# Altium PCB NANO_STM32F103.PcbDoc
Units mm, origin at the board's own origin, x right, y up, seen from the top; angles counter-clockwise.
Board outline 100 x 60 mm, 2 copper layers (Top Layer, Bottom Layer); 129 components, 126 nets, 497 pads, 0 vias.
Unrouted connection lines stored in the file: 346.
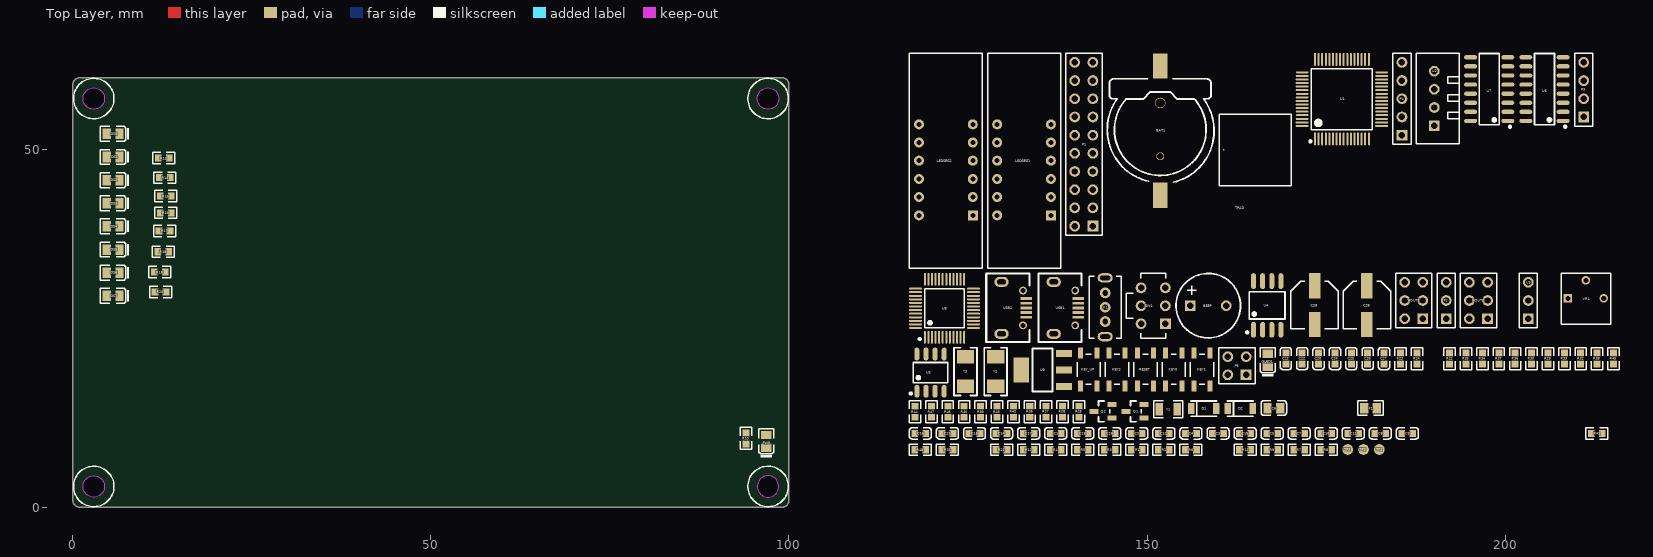
[diagram p0: Top Layer view]
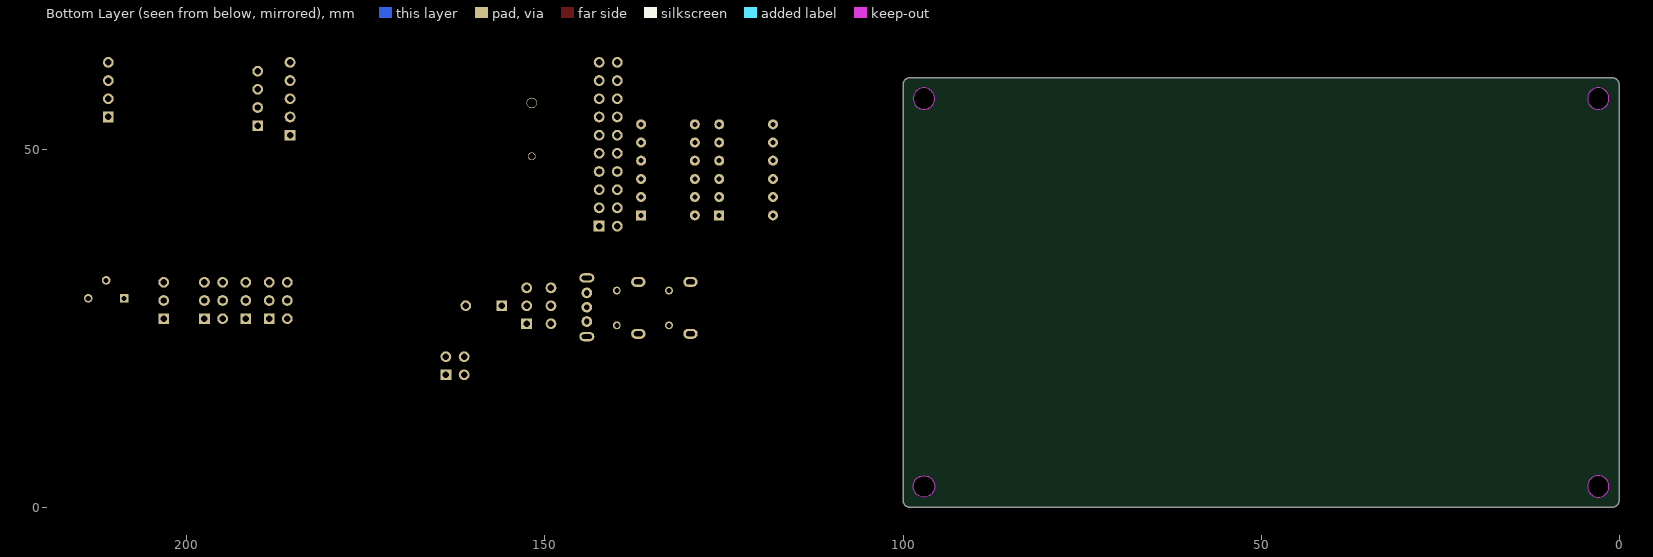
[diagram p1: Bottom Layer view, seen from below]

## Layer stack, top to bottom
Top Solder: solder mask 0.0102, Solder Resist, Dk 3.5
Top Layer: signal copper 0.0356
Dielectric 1: dielectric 0.32, FR-4, Dk 4.8
Bottom Layer: signal copper 0.0356
Bottom Solder: solder mask 0.0102, Solder Resist, Dk 3.5

## Board outline
1,0 cw(c1,1) 0,1 0,59 cw(c1,59) 1,60 99,60 cw(c99,59) 100,59 100,1 cw(c99,1) 99,0
cut-out: 95.579,2.921 ccw(c97.079,2.921) 97.079,1.421 ccw(c97.079,2.921) 98.579,2.921 ccw(c97.079,2.921) 97.079,4.421 ccw(c97.079,2.921)
cut-out: 2.921,1.421 cw(c2.921,2.921) 1.421,2.921 cw(c2.921,2.921) 2.921,4.421 cw(c2.921,2.921) 4.421,2.921 cw(c2.921,2.921)
cut-out: 2.921,55.574 cw(c2.921,57.074) 1.421,57.074 cw(c2.921,57.074) 2.921,58.574 cw(c2.921,57.074) 4.421,57.074 cw(c2.921,57.074)
cut-out: 97.079,55.574 cw(c97.079,57.074) 95.579,57.074 cw(c97.079,57.074) 97.079,58.574 cw(c97.079,57.074) 98.579,57.074 cw(c97.079,57.074)

## Design rules (kind name [scope] priority, off if disabled: settings)
Clearance [All] p1: gap=0.254 ignorepadtopadclearanceinfootprint=FALSE except(0: Arc-Hole Track-Hole SMDPad-Hole THPad-Hole Via-Hole Fill-Hole Poly-Hole Region-Hole Text-Hole)
PolygonConnect [All] p1: connectstyle=Relief reliefconductorwidth=0.254 reliefentries=4 polygonreliefangle="90 Angle" airgapwidth=0.254
RoutingVias [All] p1: holewidth=0.711 width=1.27 viastyle="Through Hole" minholewidth=0.711 minwidth=1.27 maxholewidth=0.711 maxwidth=1.27
SolderMaskExpansion [All] p1: expansion=0.102
Width [All] p1: maxlimit=0.254 minlimit=0.254 preferedwidth=0.254
30 further rules are at their usual default settings.

## Classes and differential pairs
component class NANO_STM32F103_3: C19 C20 C21 C22 C23 C24 C25 GLED1 P4 P5 Q2 R31 R32 R33 R34 R35 R36 R37 R38 R39 R40 R41 R42 R43 R44 R45 R46 R47 R48 SW1 TP1 TP2 TP3 U8 USB1 USB2 Y3
component class NANO_STM32F103_2: BEEP C13 C14 C15 C16 C17 C18 DS0 DS1 DS2 DS3 DS4 DS5 DS6 DS7 KEY0 KEY1 KEY2 KEY_UP LEDSEG1 LEDSEG2 P3 PWR Q1 R5 R6 R7 R8 R9 R10 R11 R12 R13 R14 R15 R16 R17 R18 R19 R20 R21 R22 R23 R24 R25 R26 R27 R28 R29 R30 TPAD U2 U3 U4 U5 U6 U7 VR1
component class NANO_STM32F103_1: BAT1 C1 C2 C3 C4 C5 C6 C7 C8 C9 C10 C11 C12 C26 C27 C28 C29 D1 D2 F1 K1 P1 P2 R1 R2 R3 R4 RESET U1 U9 VOUT1 VOUT2 Y1 Y2

## Components (designator, comment, footprint, x,y, rotation, side; value= is the part's Value field where it differs from the comment)
BAT1 "Battery" BAT-2 151.844,61.648 r0 top
BEEP "Bell" PIN2 158.544,28.165 r0 top
C1 "100nF (104)" 0603_C 137.238,10.328 r0 top
C2 "22pF (220)" 0603_C 148.572,10.328 r0 top
C3 "22pF (220)" 0603_C 159.906,10.328 r0 top
C4 "22pF (220)" 0603_C 156.128,10.328 r0 top
C5 "22pF (220)" 0603_C 167.462,10.328 r0 top
C6 "10uF (106)" 0805_C 167.704,13.861 r0 top
C7 "100nF (104)" 0603_C 171.24,10.328 r0 top
C8 "100nF (104)" 0603_C 182.574,10.328 r0 top
C9 "100nF (104)" 0603_C 186.352,10.328 r0 top
C10 "100nF (104)" 0603_C 175.018,10.328 r0 top
C11 "100nF (104)" 0603_C 178.796,10.328 r0 top
C12 "100nF (104)" 0603_C 152.35,10.328 r0 top
C13 "100nF (104)" 0603_C 125.904,10.328 r0 top
C14 "100nF (104)" 0603_C 129.682,10.328 r0 top
C15 "100nF (104)" 0603_C 163.684,10.328 r0 top
C16 "100nF (104)" 0603_C 118.348,10.328 r0 top
C17 "100nF (104)" 0603_C 133.46,10.328 r0 top
C18 "100nF (104)" 0603_C 141.016,10.328 r0 top
C19 "22pF (220)" 0603_C 144.794,10.328 r0 top
C20 "22pF (220)" 0603_C 173.947,20.773 r90 top
C21 "100nF (104)" 0603_C 122.126,10.328 r0 top
C22 "100nF (104)" 0603_C 171.659,20.773 r90 top
C23 "100nF (104)" 0603_C 169.371,20.773 r90 top
C24 "100nF (104)" 0603_C 176.235,20.773 r90 top
C25 "100nF (104)" 0603_C 178.523,20.773 r90 top
C26 "100nF (104)" 0603_C 180.811,20.773 r90 top
C27 "100nF (104)" 0603_C 183.099,20.773 r90 top
C28 "220uF" RB7.6-15 180.693,28.24 r0 top value=100pF
C29 "220uF" RB7.6-15 173.385,28.24 r0 top value=100pF
D1 "LL4148" LL-34 157.913,13.794 r0 top
D2 "LL4148" LL-34 163.024,13.794 r0 top
DS0 "LED" 0805_LED_S1 5.613,52.146 r180 top
DS1 "LED" 0805_LED_S1 5.613,48.917 r180 top
DS2 "LED" 0805_LED_S1 5.613,45.687 r180 top
DS3 "LED" 0805_LED_S1 5.613,42.458 r180 top
DS4 "LED" 0805_LED_S1 5.613,39.228 r180 top
DS5 "LED" 0805_LED_S1 5.613,35.999 r180 top
DS6 "LED" 0805_LED_S1 5.613,32.77 r180 top
DS7 "LED" 0805_LED_S1 5.613,29.54 r180 top
F1 "1000mA" 0805_R 181.198,13.861 r0 top
GLED1 "翠绿 0805" 0805_LED_S1 166.838,20.538 r90 top
K1 "BUTTON_DIP3" SW 144.15,27.94 r90 top
KEY0 "SW-PB" SPST-2 153.724,19.257 r90 top
KEY1 "SW-PB" SPST-2 157.682,19.257 r90 top
KEY2 "SW-PB" SPST-2 145.808,19.257 r90 top
KEY_UP "SW-PB" SPST-2 141.85,19.257 r90 top
LEDSEG1 "LEDSEG028" HDR1X12 136.571,40.78 r90 top
LEDSEG2 "LEDSEG028" HDR1X12 125.663,40.78 r90 top
P1 "Header 10X2" HDR2X10 142.439,39.27 r90 top
P2 "Header 3" HDR1X3 191.759,26.342 r90 top
P3 "Header 4" HDR1X4 210.967,54.51 r90 top
P4 "Header 5" HDR1X5 185.589,51.97 r90 top
P5 "Header 2X2" HDR2X2 163.825,18.498 r90 top
PWR "LED" 0805_LED_S1 96.825,9.22 r90 top
Q1 "SS8550" SOT-23(SOT-23-3) 148.319,13.409 r0 top
Q2 "SS8050" SOT-23(SOT-23-3) 143.858,13.409 r0 top
R1 "10Ω" 0603_R 148.572,8.04 r0 top
R2 "10KΩ" 0603_R 152.35,8.04 r0 top
R3 "100KΩ" 0603_R 144.794,8.04 r0 top
R4 "10KΩ" 0603_R 137.238,8.04 r0 top
R5 "4.7KΩ" 0603_R 141.016,8.04 r0 top
R6 "4.7KΩ" 0603_R 156.128,8.04 r0 top
R7 "1KΩ" 0603_R 171.24,8.04 r0 top
R8 "4.7KΩ" 0603_R 175.018,8.04 r0 top
R9 "4.7KΩ" 0603_R 167.462,8.04 r0 top
R10 "510Ω" 0603_R 93.98,9.619 r90 top
R11 "100KΩ" 0603_R 163.684,8.04 r0 top
R12 "1KΩ" 0603_R 133.46,8.04 r0 top
R13 "510Ω" 0603_R 12.675,48.768 r0 top
R14 "510Ω" 0603_R 12.852,46.025 r0 top
R15 "510Ω" 0603_R 12.954,43.459 r0 top
R16 "510Ω" 0603_R 12.954,41.123 r0 top
R17 "510Ω" 0603_R 12.802,38.583 r0 top
R18 "510Ω" 0603_R 12.624,35.687 r0 top
R19 "510Ω" 0603_R 12.116,32.842 r0 top
R20 "510Ω" 0603_R 12.243,30.048 r0 top
R21 "100Ω" 0603_R 129.682,8.04 r0 top
R22 "100Ω" 0603_R 192.251,20.773 r90 top
R23 "100Ω" 0603_R 185.387,20.773 r90 top
R24 "100Ω" 0603_R 187.675,20.773 r90 top
R25 "100Ω" 0603_R 140.483,13.361 r90 top
R26 "100Ω" 0603_R 133.619,13.361 r90 top
R27 "100Ω" 0603_R 135.907,13.361 r90 top
R28 "100Ω" 0603_R 138.195,13.361 r90 top
R29 "10KΩ" 0603_R 205.979,20.773 r90 top
R30 "1KΩ" 0603_R 203.691,20.773 r90 top
R31 "1KΩ" 0603_R 122.126,8.04 r0 top
R32 "10KΩ" 0603_R 210.555,20.773 r90 top
R33 "10KΩ" 0603_R 208.267,20.773 r90 top
R34 "4.7KΩ" 0603_R 196.827,20.773 r90 top
R35 "4.7KΩ" 0603_R 194.539,20.773 r90 top
R36 "100Ω" 0603_R 201.403,20.773 r90 top
R37 "10KΩ" 0603_R 199.115,20.773 r90 top
R38 "100Ω" 0603_R 212.843,20.773 r90 top
R39 "1.5KΩ" 0603_R 126.755,13.361 r90 top
R40 "36KΩ" 0603_R 124.467,13.361 r90 top
R41 "10KΩ" 0603_R 212.798,10.328 r0 top
R42 "10KΩ" 0603_R 131.331,13.361 r90 top
R43 "10Ω" 0603_R 129.043,13.361 r90 top
R44 "10Ω" 0603_R 117.603,13.361 r90 top
R45 "1.5KΩ" 0603_R 215.131,20.773 r90 top
R46 "10Ω" 0603_R 122.179,13.361 r90 top
R47 "10Ω" 0603_R 119.891,13.361 r90 top
R48 "10KΩ" 0603_R 118.348,8.04 r0 top
RESET "SW-PB" SPST-2 149.766,19.257 r90 top
SW1 "LY_SK_09C" HDR2X3_CEN 150.858,28.142 r90 top
TP1 "SWD" PIN1 182.435,8.079 r0 top
TP2 "SWC" PIN1 180.224,8.079 r90 top
TP3 "GND" PIN1 178.013,8.079 r90 top
TPAD "电容触摸键" TPAD 160.686,49.911 r90 top
U1 "STM32F103RBT6" LQFP-64_10X10X05P 177.21,56.999 r0 top
U2 "DHT11&DS18B20" DHT11&DS18B20 190.117,57.1 r90 top
U3 "HS0038" HS0038 203.241,28.882 r90 top
U4 "W25Q16" SOIC-8_208MIL 166.777,28.19 r0 top
U5 "24C02" SOIC-8_150MIL 119.763,18.807 r0 top
U6 "74HC595D" SOIC-16_150MIL 205.488,58.398 r90 top
U7 "74HC138D" SOIC-16_150MIL 197.777,58.398 r90 top
U8 "STM32F103C8T6" LQFP-48_7X7X05P 121.714,27.791 r0 top
U9 "AMS1117-3.3" SOT-223 135.416,19.166 r0 top
USB1 "USB-AB" USB_MICRO 140.39,27.841 r90 top
USB2 "USB-AB" USB_MICRO 133.101,27.841 r90 top
VOUT1 "VCC3.3" HDR2X3 188.511,26.342 r90 top
VOUT2 "VCC5" HDR2X3 197.547,26.342 r90 top
VR1 "GF063P1" VR5 211.268,30.442 r0 top value=1K
Y1 "32.768KHz ±20ppm 12.5pF" "SMD-3215_2P FC - 135" 152.953,13.696 r0 top
Y2 "8MHz ±20ppm 20pF" SMD-5032_2P 128.86,18.956 r90 top
Y3 "8MHz ±20ppm 20pF" SMD-5032_2P 124.652,18.956 r90 top

## Footprints (in the part's own frame and the unit in brackets; to place one, negate y for a bottom-side part, rotate by r counter-clockwise, add the part's x,y. Pads: shape width x height; smd on the part's side, far side on the other; paste and mask are expansions set on the pad)
0603_C [mm]
  rect 0.93x0.98 smd: 1(-0.77,0) 2(0.77,0)
  silkscreen extent -1.53,-0.79 1.54,0.79, body extent -0.8,-0.4 0.8,0.4, height 0.3
0603_R [mm]
  rect 0.93x0.98 smd: 1(-0.77,0) 2(0.77,0)
  silkscreen extent -1.53,-0.79 1.54,0.79, body extent -0.85,-0.4 0.85,0.4, height 0.56
0805_C [mm]
  rect 1.16x1.47 smd: 1(-0.89,0) 2(0.89,0)
  silkscreen extent -1.77,-1.04 1.77,1.04, body extent -1,-0.62 1,0.63, height 0.77
0805_LED_S1 [mm]
  rect 1.16x1.47 smd: A(0.89,0) K(-0.89,0)
  silkscreen extent -2.25,-1.04 1.77,1.03, body extent -1.01,-0.62 1.01,0.62, height 1.1
0805_R [mm]
  rect 1.16x1.47 smd: 1(-0.89,0) 2(0.89,0)
  silkscreen extent -1.77,-1.04 1.77,1.03, body extent -1,-0.62 1,0.63, height 0.49
BAT-2 [mm] "Battery; 2 Leads"
  rect 2x3.5 smd: 1(0,0) 2(0,-18.067)
  round 1.45 hole 1.3: 3(0,-5.181)
  round 1.1 hole 0.95: 4(0,-12.631)
  silkscreen extent -7.4,-16.26 7.52,-1.81, body extent -7.5,-17.99 7.49,0.51, height 3.99
DHT11&DS18B20 [mm] "DHT11&DS18B20_2.54mm"
  rect 1.5x1.5 hole 0.9: 1(-3.81,0)
  round 1.5 hole 0.9: 2(-1.27,0) 3(1.27,0) 4(3.81,0)
  silkscreen extent -6.3,-3.45 6.3,2.55, body extent -5.08,-1.27 5.08,1.27, height 6.12
HDR1X3 [mm] "Connector; Header; 3 Position"
  rect 1.5x1.5 hole 0.9: 1(0,0)
  round 1.5 hole 0.9: 2(2.54,0) 3(5.08,0)
  silkscreen extent -1.27,-1.27 6.35,1.27, body extent -1.27,-1.27 6.35,1.27, height 10.15
HDR1X4 [mm] "Connector; Header; 4 Position"
  rect 1.5x1.5 hole 0.9: 1(0,0)
  round 1.5 hole 0.9: 2(2.54,0) 3(5.08,0) 4(7.62,0)
  silkscreen extent -1.27,-1.27 8.89,1.27, body extent -1.27,-1.27 8.89,1.27, height 1.02
HDR1X5 [mm] "Connector; Header; 5 Position"
  rect 1.5x1.5 hole 0.9: 1(0,0)
  round 1.5 hole 0.9: 2(2.54,0) 3(5.08,0) 4(7.62,0) 5(10.16,0)
  silkscreen extent -1.27,-1.27 11.43,1.27, body extent -1.27,-1.27 11.43,1.27, height 10.17
HDR1X12 [mm] "0.28英寸共阴数码管四位_JM-S02843AH-001"
  rect 1.4x1.4 hole 0.7: 1(0,0)
  round 1.4 hole 0.7: 2(2.54,0) 3(5.08,0) 4(7.62,0) 5(10.16,0) 6(12.7,0) 7(12.7,7.5) 8(10.16,7.5) 9(7.62,7.5) 10(5.08,7.5) 11(2.54,7.5) 12(0,7.5)
  silkscreen extent -7.38,-1.35 22.62,8.85, body extent -7.38,-1.35 22.62,8.85, height 4
HDR2X2 [mm] "Connector; Header; 2x2 Position"
  rect 1.5x1.5 hole 0.9: 1(0,0)
  round 1.5 hole 0.9: 2(0,2.54) 3(2.54,0) 4(2.54,2.54)
  silkscreen extent -1.27,-1.27 3.81,3.81, body extent -1.27,-1.27 3.81,3.81, height 10.18
HDR2X3 [mm] "Connector; Header; 3x2 Position"
  rect 1.5x1.5 hole 0.9: 1(0,0)
  round 1.5 hole 0.9: 2(0,2.54) 3(2.54,0) 4(2.54,2.54) 5(5.08,0) 6(5.08,2.54)
  silkscreen extent -1.27,-1.27 6.35,3.81, body extent -1.27,-1.27 6.35,3.81, height 10.18
HDR2X3_CEN [mm] "Connector; Header; 3x2 Position"
  rect 1.5x1.5 hole 0.9: 1(-2.5,-1.7)
  round 1.5 hole 0.9: 2(0,-1.7) 3(2.5,-1.7) 4(-2.5,1.7) 5(0,1.7) 6(2.5,1.7)
  silkscreen extent -4.55,-1.75 4.55,3.75, body extent -4.5,-1.8 4.5,1.8, height 5.5
HDR2X10 [mm] "Connector; Header; 10x2 Position"
  rect 1.5x1.5 hole 0.9: 1(0,0)
  round 1.5 hole 0.9: 2(0,2.54) 3(2.54,0) 4(2.54,2.54) 5(5.08,0) 6(5.08,2.54) 7(7.62,0) 8(7.62,2.54) 9(10.16,0) 10(10.16,2.54) 11(12.7,0) 12(12.7,2.54) 13(15.24,0) 14(15.24,2.54) 15(17.78,0) 16(17.78,2.54) 17(20.32,0) 18(20.32,2.54) 19(22.86,0) 20(22.86,2.54)
  silkscreen extent -1.27,-1.27 24.13,3.81, body extent -1.27,-1.27 24.13,3.81, height 10.18
HS0038 [mm] "2.54mm"
  rect 1.5x1.5 hole 0.9: 1(-2.54,0)
  round 1.5 hole 0.9: 2(0,0) 3(2.54,0)
  silkscreen extent -3.81,-1.27 3.81,1.27, body extent -3,-3.97 3,3.82, height 8.97
LL-34 [mm]
  rect 0.9x1.5 smd: 1(1.75,0) 2(-1.75,0)
  silkscreen extent -1.8,-1.08 1.8,1.08, body extent -1.75,-0.75 1.75,0.75, height 1.5
LQFP-48_7X7X05P [mm]
  oval 0.28x1.8 smd mask+0.051: 1(-2.75,-4.05) 2(-2.25,-4.05) 3(-1.75,-4.05) 4(-1.25,-4.05) 5(-0.75,-4.05) 6(-0.25,-4.05) 7(0.25,-4.05) 8(0.75,-4.05) 9(1.25,-4.05) 10(1.75,-4.05) 11(2.25,-4.05) 12(2.75,-4.05) 25(2.75,4.05) 26(2.25,4.05) 27(1.75,4.05) 28(1.25,4.05) 29(0.75,4.05) 30(0.25,4.05) 31(-0.25,4.05) 32(-0.75,4.05) 33(-1.25,4.05) 34(-1.75,4.05) 35(-2.25,4.05) 36(-2.75,4.05)
  oval 1.8x0.28 smd mask+0.051: 13(4.05,-2.75) 14(4.05,-2.25) 15(4.05,-1.75) 16(4.05,-1.25) 17(4.05,-0.75) 18(4.05,-0.25) 19(4.05,0.25) 20(4.05,0.75) 21(4.05,1.25) 22(4.05,1.75) 23(4.05,2.25) 24(4.05,2.75) 37(-4.05,2.75) 38(-4.05,2.25) 39(-4.05,1.75) 40(-4.05,1.25) 41(-4.05,0.75) 42(-4.05,0.25) 43(-4.05,-0.25) 44(-4.05,-0.75) 45(-4.05,-1.25) 46(-4.05,-1.75) 47(-4.05,-2.25) 48(-4.05,-2.75)
  silkscreen extent -3.6,-4.42 2.75,2.75, body extent -4.5,-4.5 4.5,4.5, height 1.56
LQFP-64_10X10X05P [mm]
  oval 0.28x1.8 smd mask+0.051: 1(-3.75,-5.55) 2(-3.25,-5.55) 3(-2.75,-5.55) 4(-2.25,-5.55) 5(-1.75,-5.55) 6(-1.25,-5.55) 7(-0.75,-5.55) 8(-0.25,-5.55) 9(0.25,-5.55) 10(0.75,-5.55) 11(1.25,-5.55) 12(1.75,-5.55) 13(2.25,-5.55) 14(2.75,-5.55) 15(3.25,-5.55) 16(3.75,-5.55) 33(3.75,5.55) 34(3.25,5.55) 35(2.75,5.55) 36(2.25,5.55) 37(1.75,5.55) 38(1.25,5.55) 39(0.75,5.55) 40(0.25,5.55) 41(-0.25,5.55) 42(-0.75,5.55) 43(-1.25,5.55) 44(-1.75,5.55) 45(-2.25,5.55) 46(-2.75,5.55) 47(-3.25,5.55) 48(-3.75,5.55)
  oval 1.8x0.28 smd mask+0.051: 17(5.55,-3.75) 18(5.55,-3.25) 19(5.55,-2.75) 20(5.55,-2.25) 21(5.55,-1.75) 22(5.55,-1.25) 23(5.55,-0.75) 24(5.55,-0.25) 25(5.55,0.25) 26(5.55,0.75) 27(5.55,1.25) 28(5.55,1.75) 29(5.55,2.25) 30(5.55,2.75) 31(5.55,3.25) 32(5.55,3.75) 49(-5.55,3.75) 50(-5.55,3.25) 51(-5.55,2.75) 52(-5.55,2.25) 53(-5.55,1.75) 54(-5.55,1.25) 55(-5.55,0.75) 56(-5.55,0.25) 57(-5.55,-0.25) 58(-5.55,-0.75) 59(-5.55,-1.25) 60(-5.55,-1.75) 61(-5.55,-2.25) 62(-5.55,-2.75) 63(-5.55,-3.25) 64(-5.55,-3.75)
  silkscreen extent -4.55,-6.05 4.25,4.25, body extent -6,-6 6,6, height 1.6
PIN1 [mm] "测试焊盘"
  round 1.5 smd: 1(0,0)
PIN2 [mm] "Photosensitive Diode; 2 Leads"
  rect 1.5x1.5 hole 0.9: 1(-2.5,0)
  round 1.5 hole 0.9: 2(2.5,0)
  silkscreen extent -4.5,-4.5 4.5,4.5, body extent -4.55,-4.55 4.55,4.55, height 5.63
RB7.6-15 [mm] "6.5mm*5.4mm贴片电解电容"
  rect 1.6x3.5 smd: 1(0,2.7) 2(0,-2.7)
  silkscreen extent -3.3,-3.3 3.3,3.3, body extent -3.3,-3.5 3.3,3.5, height 5.41
"SMD-3215_2P FC - 135" [mm]
  rect 1x1.8 smd: 1(-1.25,0) 2(1.25,0)
  silkscreen extent -2.05,-1.2 2.05,1.2, body extent -1.61,-0.76 1.61,0.76, height 0.91
SMD-5032_2P [mm]
  rect 1.9x2.4 smd: 1(-2.05,0) 2(2.05,0)
  silkscreen extent -3.32,-1.6 3.32,1.6, body extent -3.1,-1.85 3.1,1.85
SOIC-8_150MIL [mm]
  oval 0.7x1.8 smd: 1(-1.905,-2.6) 2(-0.635,-2.6) 3(0.635,-2.6) 4(1.905,-2.6) 5(1.905,2.6) 6(0.635,2.6) 7(-0.635,2.6) 8(-1.905,2.6)
  silkscreen extent -2.9,-3.05 2.4,1.4, body extent -2.5,-3.1 2.5,3.1, height 1.72
SOIC-8_208MIL [mm]
  oval 0.7x2.2 smd: 1(-1.905,-3.4) 2(-0.635,-3.4) 3(0.635,-3.4) 4(1.905,-3.4) 5(1.905,3.4) 6(0.635,3.4) 7(-0.635,3.4) 8(-1.905,3.4)
  silkscreen extent -2.95,-3.9 2.5,1.9, body extent -2.7,-4.1 2.7,4.1, height 2.14
SOIC-16_150MIL [mm]
  oval 0.6x1.8 smd: 1(-4.445,-2.6) 2(-3.175,-2.6) 3(-1.905,-2.6) 4(-0.635,-2.6) 5(0.635,-2.6) 6(1.905,-2.6) 7(3.175,-2.6) 8(4.445,-2.6) 9(4.445,2.6) 10(3.175,2.6) 11(1.905,2.6) 12(0.635,2.6) 13(-0.635,2.6) 14(-1.905,2.6) 15(-3.175,2.6) 16(-4.445,2.6)
  silkscreen extent -5.4,-3.05 4.97,1.4, body extent -4.9,-2.9 4.9,2.9, height 1.75
SOT-23(SOT-23-3) [mm]
  rect 1.25x0.7 smd: 1(1.25,-0.95) 2(1.25,0.95) 3(-1.25,0)
  silkscreen extent -0.65,-1.46 0.9,1.46, body extent -1.5,-1.5 1.5,1.5, height 1.3
SOT-223 [mm]
  rect 2.2x1 smd: 1(3,-2.3) 2(3,0) 3(3,2.3)
  rect 2.2x3.5 smd: 2(-3,0)
  silkscreen extent -1.4,-3 1.4,3, body extent -3.49,-3.24 3.49,3.24, height 1.64
SPST-2 [mm] "Switch; 2 Leads"
  rect 1.5x0.7 smd: 1(-2.3,1.125) 1(2.3,1.125) 2(-2.3,-1.125) 2(2.3,-1.125)
  silkscreen extent -2.1,-1.63 2.1,1.63, body extent -2.3,-1.6 2.3,1.6, height 2.52
SW [mm] "拨动开关"
  oval 1.3x2.1 hole 1.4 slot 0.6 at 0 deg: 1(-4.1,0) 5(4.1,0)
  round 1.5 hole 0.8: 2(-2,0) 3(0,0) 4(2,0)
  silkscreen extent -4.3,-2.25 4.3,2.25, body extent -4.27,-2.15 4.33,2.15, height 8.08
TPAD [mm] "电容触摸按键"
  round 0.2 smd: 1(0,0)
  Top Layer pour cut-out: 13.589,-6.031
  Top Layer pour cut-out: 0,0.635
  silkscreen extent -5,-9.42 5,0.58
USB_MICRO [mm]
  rect 0.4x1.6 smd: 1(1.3,0) 2(0.65,0) 3(0,0) 4(-0.65,0) 5(-1.3,0)
  round 1.1 hole 0.7: 6(-2.425,0.419) 9(2.425,0.419)
  oval 1.4x2 hole 0.7 slot 1.2 at 90 deg: 7(-3.612,3.422) 8(3.638,3.422)
  silkscreen extent -4.78,-0.47 4.8,5.56, body extent -4.1,0.45 4.1,5.88, height 2.66
VR5 [mm] "Thru-Hole; 3 Leads"
  rect 1.2x1.2 hole 0.7: 1(-2.5,-1.25)
  round 1.2 hole 0.7: 2(0,1.25) 3(2.5,-1.25)
  silkscreen extent -3.45,-4.85 3.45,2.25, body extent -3.35,-4.82 3.36,2.21, height 4.73

## Part data
BAT1: "Multicell Battery", LatestRevisionDate=17-Jul-2002, LatestRevisionNote="Re-released for DXP Platform.", PackageDescription="Battery; 2 Leads", PackageReference=BAT-2, Published=24-Mar-1999, Publisher="Altium Limited"
BEEP: "Electrical Bell", LatestRevisionDate=17-Jul-2002, LatestRevisionNote="Re-released for DXP Platform.", PackageReference=PIN2, Published=24-Mar-1999, Publisher="Altium Limited"
C1 C7 C8 C9 C10 C11 C12 C13 C14 C15 C16 C17 C18 C21 C22 C23 C24 C25 C26 C27: library part "0603 100nF (104) 10% 50V", "贴片电容", Package=0603, SuppliersPartNumber=C14663, ComponentLink1Description=供应商, ComponentLink1URL=http://www.szlcsc.com/product/details_15331.html, Supplier=LC
C2 C3 C4 C5 C19 C20: library part "0603 22pF (220) 5% 50V", "贴片电容", Package=0603, SuppliersPartNumber=C1653, ComponentLink1Description=供应商, ComponentLink1URL=http://www.szlcsc.com/product/details_2005.html, Supplier=LC
C6: library part "0805 10uF (106) 10% 25V", "贴片电容", Package=0805, SuppliersPartNumber=C15850, ComponentLink1Description=供应商, ComponentLink1URL=http://www.szlcsc.com/product/details_16532.html, Supplier=LC
C28 C29: library part "Cap Pol1", "电解电容", LatestRevisionDate=17-Jul-2002, LatestRevisionNote="Re-released for DXP Platform.", PackageDescription="Polarized Capacitor (Radial); 2 Leads", PackageReference=RB7.6-15, Published=8-Jun-2000, Publisher="Altium Limited"
D1 D2: library part "LL-34 LL4148 LL-34 1206", "开关二极管", Package=LL-34, SuppliersPartNumber=C9808, ComponentLink1Description=供应商, ComponentLink1URL=http://www.szlcsc.com/product/details_10338.html, Supplier=LC
DS0 DS1 DS2 DS3 DS4 DS5 DS6 DS7 PWR: library part "0603 红灯", "发光二极管", Package=0603, SuppliersPartNumber=C2286, ComponentLink1Description=供应商, ComponentLink1URL=http://www.szlcsc.com/product/details_2659.html, Supplier=LC
F1: library part "0805 1KΩ (1001) 1%", "自恢复保险丝", Package=0805, SuppliersPartNumber=C17513, ComponentLink1Description=供应商, ComponentLink1URL=http://www.szlcsc.com/product/details_18201.html, Supplier=LC
GLED1: library part "0805 翠绿", "发光二极管", Package=0805, SuppliersPartNumber=C2297, ComponentLink1Description=供应商, ComponentLink1URL=http://www.szlcsc.com/product/details_2670.html, Supplier=LC
K1: "拨动开关"
KEY0 KEY1 KEY2 KEY_UP: "Switch", LatestRevisionDate=17-Jul-2002, LatestRevisionNote="Re-released for DXP Platform.", PackageDescription="Switch; 2 Leads", PackageReference=SPST-2, Published=24-Mar-1999, Publisher="Altium Limited"
LEDSEG1 LEDSEG2: "四位八段数码管_共阴极"
P1: "Header, 10-Pin, Dual row", LatestRevisionDate=17-Jul-2002, LatestRevisionNote="Re-released for DXP Platform.", Publisher="Altium Limited"
P2: "Header, 3-Pin", LatestRevisionDate=17-Jul-2002, LatestRevisionNote="Re-released for DXP Platform.", Publisher="Altium Limited"
P3: "Header, 4-Pin", LatestRevisionDate=17-Jul-2002, LatestRevisionNote="Re-released for DXP Platform.", Publisher="Altium Limited"
P4: "Header, 5-Pin", LatestRevisionDate=17-Jul-2002, LatestRevisionNote="Re-released for DXP Platform.", Publisher="Altium Limited"
P5: "Header, 2-Pin, Dual row", LatestRevisionDate=17-Jul-2002, LatestRevisionNote="Re-released for DXP Platform.", Publisher="Altium Limited"
Q1: library part "SOT-23 SS8550 Y2", "PNP三极管", Package=SOT-23, SuppliersPartNumber=C8542, ComponentLink1Description=供应商, ComponentLink1URL=http://www.szlcsc.com/product/details_9037.html, Supplier=LC
Q2: library part "SOT-23 SS8050 Y1", "NPN三极管", Package=SOT-23, SuppliersPartNumber=C2150, ComponentLink1Description=供应商, ComponentLink1URL=http://www.szlcsc.com/product/details_2507.html, Supplier=LC
R1 R43 R44 R46 R47: library part "0603 10Ω (10R0) 1%", "贴片电阻", Package=0603, SuppliersPartNumber=C22859, ComponentLink1Description=供应商, ComponentLink1URL=http://www.szlcsc.com/product/details_23586.html, Supplier=LC
R2 R4 R29 R32 R33 R37 R41 R42 R48: library part "0603 10KΩ (1002) 1%", "贴片电阻", Package=0603, SuppliersPartNumber=C25804, ComponentLink1Description=供应商, ComponentLink1URL=http://www.szlcsc.com/product/details_26547.html, Supplier=LC
R3 R11: library part "0603 100KΩ (1003) 1%", "贴片电阻", Package=0603, SuppliersPartNumber=C25803, ComponentLink1Description=供应商, ComponentLink1URL=http://www.szlcsc.com/product/details_26546.html, Supplier=LC
R5 R6 R8 R9 R34 R35: library part "0603 4.7KΩ (4701) 1%", "贴片电阻", Package=0603, SuppliersPartNumber=C23162, ComponentLink1Description=供应商, ComponentLink1URL=http://www.szlcsc.com/product/details_23889.html, Supplier=LC
R7 R12 R30 R31: library part "0603 1KΩ (1001) 1%", "贴片电阻", Package=0603, SuppliersPartNumber=C21190, ComponentLink1Description=供应商, ComponentLink1URL=http://www.szlcsc.com/product/details_21904.html, Supplier=LC
R10 R13 R14 R15 R16 R17 R18 R19 R20: library part "0603 510Ω (5100) 1%", "贴片电阻", Package=0603, SuppliersPartNumber=C23193, ComponentLink1Description=供应商, ComponentLink1URL=http://www.szlcsc.com/product/details_23920.html, Supplier=LC
R21 R22 R23 R24 R25 R26 R27 R28 R36 R38: library part "0603 100Ω (1000) 1%", "贴片电阻", Package=0603, SuppliersPartNumber=C22775, ComponentLink1Description=供应商, ComponentLink1URL=http://www.szlcsc.com/product/details_23502.html, Supplier=LC
R39 R45: library part "0603 1.5KΩ (1501) 1%", "贴片电阻", Package=0603, SuppliersPartNumber=C22843, ComponentLink1Description=供应商, ComponentLink1URL=http://www.szlcsc.com/product/details_23570.html, Supplier=LC
R40: library part "0603 36KΩ (3602) 1%", "贴片电阻", Package=0603, SuppliersPartNumber=C23147, ComponentLink1Description=供应商, ComponentLink1URL=http://www.szlcsc.com/product/details_23874.html, Supplier=LC
RESET: "RESET", LatestRevisionDate=17-Jul-2002, LatestRevisionNote="Re-released for DXP Platform.", PackageDescription="Switch; 2 Leads", PackageReference=SPST-2, Published=24-Mar-1999, Publisher="Altium Limited"
SW1: library part Switch_1
TP1 TP2 TP3: library part PAN, "圆形焊盘"
TPAD: library part Socket, LatestRevisionDate=17-Jul-2002, LatestRevisionNote="Re-released for DXP Platform.", Publisher="Altium Limited"
U1: "ARM", Package=LQFP-64_10x10x05P, SuppliersPartNumber=C8735, ComponentLink1Description=供应商, ComponentLink1URL=http://www.szlcsc.com/product/details_9244.html, Supplier=LC
U2: "DHT11或DS18B20_2.54mm"
U3: "HS0038_2.54mm"
U4: library part W25Q128FVSIG_[C35101], "Flash ROM", Package=SOIC-8, SuppliersPartNumber=C35101, ComponentLink1Description=供应商, ComponentLink1URL=http://www.szlcsc.com/product/details_36072.html, Supplier=LC
U5: library part CAN/TJA1050T/CM_[C6952], Package=SOIC-8_150mil, SuppliersPartNumber=C6952, ComponentLink1Description=供应商, ComponentLink1URL=http://www.szlcsc.com/product/details_7424.html, Supplier=LC
U6: library part 74HC595D_[C5947], "74系列逻辑芯片", Package=SOIC-16_150mil, SuppliersPartNumber=C5947, ComponentLink1Description=供应商, ComponentLink1URL=http://www.szlcsc.com/product/details_6413.html, Supplier=LC
U7: library part 74HC138D_[C5602], "74系列逻辑芯片", Package=SOIC-16_150mil, SuppliersPartNumber=C5602, ComponentLink1Description=供应商, ComponentLink1URL=http://www.szlcsc.com/product/details_6053.html, Supplier=LC
U8: "ARM", Package=LQFP-48_7x7x05P, SuppliersPartNumber=C8734, ComponentLink1Description=供应商, ComponentLink1URL=http://www.szlcsc.com/product/details_9243.html, Supplier=LC
U9: library part "SOT-223 AMS1117-3.3", "低压差线性稳压(LDO)", Package=SOT-223, SuppliersPartNumber=C6186, ComponentLink1Description=供应商, ComponentLink1URL=http://www.szlcsc.com/product/details_6652.html, Supplier=LC
USB1 USB2: library part USB_1
VOUT1 VOUT2: library part "Header 3X2", "Header, 3-Pin, Dual row", LatestRevisionDate=17-Jul-2002, LatestRevisionNote="Re-released for DXP Platform.", Publisher="Altium Limited"
VR1: library part RPot, "滑动变阻器", LatestRevisionDate=17-Jul-2002, LatestRevisionNote="Re-released for DXP Platform.", PackageDescription="Variable Resistor, Thru-Hole; 3 Leads", PackageReference=VR5, Published=8-Jun-2000, Publisher="Altium Limited", Set Position=0.5, Sim Note="Enter the Resistance value and the set point into parameter fields."
Y1: library part "SMD-3215_2P 32.768KHz 20ppm 12.5pF", "贴片晶振", Package=SMD-3215_2P, SuppliersPartNumber=C32346, ComponentLink1Description=供应商, ComponentLink1URL=http://www.szlcsc.com/product/details_33310.html, Supplier=LC
Y2 Y3: library part "SMD-5032_2P 8MHz 20ppm 20pF", "贴片晶振", Package=SMD-5032_2P, SuppliersPartNumber=C115962, ComponentLink1Description=供应商, ComponentLink1URL=http://www.szlcsc.com/product/details_117214.html, Supplier=LC

## Nets (pads, with @x,y where several pads share a name; then routed paths per layer and width w, separated by ;. In a path a pad name is that pad's centre, name@x,y a point inside that pad or via, vN(x,y) a via of type N, cw(c..) or ccw(c..) an arc to the next point about the centre after c; other vN are vias at no path point)
1WIRE_DQ: P1.15 R9.1 U1.62 U2.2
AIN: R41.1 R42.2 U8.10
BEEP: R30.1 U1.61
BOOT0: P2.2 R2.2 U1.60
F_CS: U1.33 U4.1
GND: BAT1.2 BEEP.2 C1.1 C2.2 C3.1 C4.1 C5.1 C6.2 C7.2 C8.1 C9.1 C10.1 C11.1 C12.1 C13.2 C14.1 C15.2 C16.2 C17.2 C18.2 C19.1 C20.1 C21.2 C22.2 C23.2 C24.2 C25.2 C26.1 C27.1 C28.2 C29.2 K1.4 K1.5 KEY0.1 KEY1.1 KEY2.1 P1.1 P2.3 P3.4 P4.1 PWR.K R2.1 R3.1 R29.1 R32.1 R33.1 R34.2 R40.1 R42.1 RESET.2 TP3.1 U1.12 U1.18 U1.31 U1.47 U1.63 U2.3 U2.4 U3.2 U4.4 U5.1 U5.2 U5.3 U5.4 U5.7 U6.8 U6.13 U7.4 U7.5 U7.8 U8.8 U8.20 U8.23 U8.35 U8.47 U9.1 USB1.5 USB1.6 USB1.7 USB1.8 USB1.9 USB2.5 USB2.6 USB2.7 USB2.8 USB2.9 VOUT1.1 VOUT1.3 VOUT1.5 VOUT2.1 VOUT2.3 VOUT2.5 VR1.2
HC138_A0: U1.51 U7.1
HC138_A1: U1.52 U7.2
HC138_A2: U1.53 U7.3
HC595_DATA: R29.2 U1.55 U6.14
HC595_LCLK: U1.56 U6.12
HC595_QA: R21.2 U6.15
HC595_QB: R22.2 U6.1
HC595_QC: R23.2 U6.2
HC595_QD: R24.2 U6.3
HC595_QE: R25.2 U6.4
HC595_QF: R26.2 U6.5
HC595_QG: R27.2 U6.6
HC595_QH: R28.2 U6.7
HC595_SCLK: U1.57 U6.11
IIC_SCL: R5.1 U1.58 U5.6
IIC_SDA: R6.1 U1.59 U5.5
JTCK: P4.2 U1.49 U8.15 U8.26
JTMS: SW1.1 U1.46
KEY0: KEY0.2 P1.20 U1.39
KEY1: KEY1.2 P1.19 U1.40
KEY2: KEY2.2 P1.16 U1.54
LED0: R13.2 U1.8
LED1: R14.2 U1.9
LED2: R15.2 U1.10
LED3: R16.2 U1.11
LED4: R17.2 U1.24
LED5: R18.2 U1.25
LED6: R19.2 U1.37
LED7: R20.2 U1.38
LEDSEG_A: LEDSEG1.11 LEDSEG2.11 R21.1
LEDSEG_B: LEDSEG1.7 LEDSEG2.7 R22.1
LEDSEG_C: LEDSEG1.4 LEDSEG2.4 R23.1
LEDSEG_CH1: LEDSEG1.12 U7.15
LEDSEG_CH2: LEDSEG1.9 U7.14
LEDSEG_CH3: LEDSEG1.8 U7.13
LEDSEG_CH4: LEDSEG1.6 U7.12
LEDSEG_CH5: LEDSEG2.12 U7.11
LEDSEG_CH6: LEDSEG2.9 U7.10
LEDSEG_CH7: LEDSEG2.8 U7.9
LEDSEG_CH8: LEDSEG2.6 U7.7
LEDSEG_D: LEDSEG1.2 LEDSEG2.2 R24.1
LEDSEG_DOT: LEDSEG1.3 LEDSEG2.3 R28.1
LEDSEG_E: LEDSEG1.1 LEDSEG2.1 R25.1
LEDSEG_F: LEDSEG1.10 LEDSEG2.10 R26.1
LEDSEG_G: LEDSEG1.5 LEDSEG2.5 R27.1
NetBAT1_1: BAT1.1 D2.1
NetBEEP_1: BEEP.1 Q1.3
NetC4_2: C4.2 U1.5 Y2.2
NetC5_2: C5.2 U1.6 Y2.1
NetC6_1: C6.1 C7.1 R1.2 U1.13
NetC19_2: C19.2 U8.5 Y3.2
NetC20_2: C20.2 U8.6 Y3.1
NetD1_2: D1.2 D2.2 U1.1
NetDS0_K: DS0.K R13.1
NetDS1_K: DS1.K R14.1
NetDS2_K: DS2.K R15.1
NetDS3_K: DS3.K R16.1
NetDS4_K: DS4.K R17.1
NetDS5_K: DS5.K R18.1
NetDS6_K: DS6.K R19.1
NetDS7_K: DS7.K R20.1
NetGLED1_A: GLED1.A R31.1
NetPWR_A: PWR.A R10.2
NetQ1_1: Q1.1 R30.2
NetQ2_1: Q2.1 R37.1 R38.1 R40.2
NetQ2_2: Q2.2 R39.2
NetR7_2: R7.2 R8.2 U3.1
NetR12_2: R12.2 VR1.3
NetR32_2: R32.2 U8.2
NetR33_2: R33.2 U8.3
NetR34_1: R34.1 U8.44
NetR35_1: R35.1 U8.39
nRST: C12.2 R4.1 RESET.1 SW1.4 U1.7 U6.10
PA0: KEY_UP.2 P1.3 U1.14
PA1: P1.4 U1.15
PA2: P1.5 U1.16
PA3: P1.6 U1.17
PA4: P1.7 U1.20
PA5: P1.8 U1.21
PA6: P1.9 U1.22
PA7: P1.10 U1.23
PA8: P1.18 U1.41
PA9: P5.4 U1.42
PA10: P5.2 U1.43
PA11: R47.1 U1.44
PA12: R46.1 U1.45
PA15: P1.17 U1.50
PB0: R7.1 U1.26
PB1: P3.2 U1.27
PB2: P1.11 R3.2 U1.28
PB10: P1.12 U1.29
PB11: P1.13 U1.30
PB13: U1.34 U4.6
PB14: U1.35 U4.2
PB15: U1.36 U4.5
PC13: P1.14 U1.2
PC14: C2.1 U1.3 Y1.2
PC15: C3.2 U1.4 Y1.1
ST_USB_D+: R43.1 U8.33
ST_USB_D-: R44.1 U8.32
ST_USB_DM: R44.2 USB1.2
ST_USB_DP: R39.1 R43.2 USB1.3
STLINK_RX: P5.3 U8.13
STLINK_STA: GLED1.K U8.30
STLINK_TX: P5.1 U8.12
STM_JTCK: TP2.1 U8.37
STM_JTMS: TP1.1 U8.34
STM_RST: C25.1 R48.1 U8.7
T_JTMS: P4.3 R36.1 SW1.2 U8.27
T_NRST: P4.5 SW1.5 U8.18
T_SWDIO_IN: R36.2 U8.25
TPAD: P3.1 R11.2 TPAD.1
USB_DM: R47.2 USB2.2
USB_DP: R45.1 R46.2 USB2.3
USB_RENUM: R38.2 U8.38
VBTN: F1.2 K1.1
VCC3.3: C1.2 C8.2 C9.2 C10.2 C11.2 C13.1 C14.2 C15.1 C16.1 C21.1 C22.1 C23.1 C24.1 C26.2 C28.1 D1.1 DS0.A DS1.A DS2.A DS3.A DS4.A DS5.A DS6.A DS7.A KEY_UP.1 P1.2 P2.1 P4.4 Q1.2 Q2.3 R1.1 R4.2 R5.2 R6.2 R8.1 R9.2 R10.1 R11.1 R31.2 R35.2 R41.2 R45.2 R48.2 U1.19 U1.32 U1.48 U1.64 U2.1 U3.3 U4.3 U4.7 U4.8 U5.8 U7.6 U8.1 U8.9 U8.24 U8.36 U8.48 U9.3 VOUT1.2 VOUT1.4 VOUT1.6 VR1.1
VCC5: C17.1 C18.1 C27.2 C29.1 K1.2 U6.16 U7.16 U9.2 VOUT2.2 VOUT2.4 VOUT2.6
VOL_SRC: P3.3 R12.1
VUSB: F1.1 R37.2 USB1.1 USB2.1
pads on no net: BAT1.3 BAT1.4 K1.3 SW1.3 SW1.6 U6.9 U8.4 U8.11 U8.14 U8.16 U8.17 U8.19 U8.21 U8.22 U8.28 U8.29 U8.31 U8.40 U8.41 U8.42 U8.43 U8.45 U8.46 USB1.4 USB2.4

## Silkscreen, mask and mechanical layers (free items; w line width, h text height)
Top Overlay:
  circle w0.2: c97.079,2.921 r2.825
  circle w0.2: c97.079,57.074 r2.825
  circle w0.2: c2.921,57.074 r2.825
  circle w0.2: c2.921,2.921 r2.825
Mechanical 1:
  circle w0.2: c97.079,2.921 r1.5
  circle w0.2: c97.079,57.074 r1.5
  circle w0.2: c2.921,57.074 r1.5
  circle w0.2: c2.921,2.921 r1.5
  lines w0.2: 0,1 ccw(c1,1) 1,0 99,0 ccw(c99,1) 100,1 100,59 ccw(c99,59) 99,60 1,60 ccw(c1,59) 0,59 0,1